# Altium PCB 新核心板PCB.PcbDoc (part 1 of 3)
Units mil, origin at the board's own origin, x right, y up, seen from the top; angles counter-clockwise.
Board outline 5840.03 x 4550.03 mil, 2 copper layers (Top Layer, Bottom Layer); 116 components, 170 nets, 698 pads, 425 vias.
Unrouted connection lines stored in the file: 1.
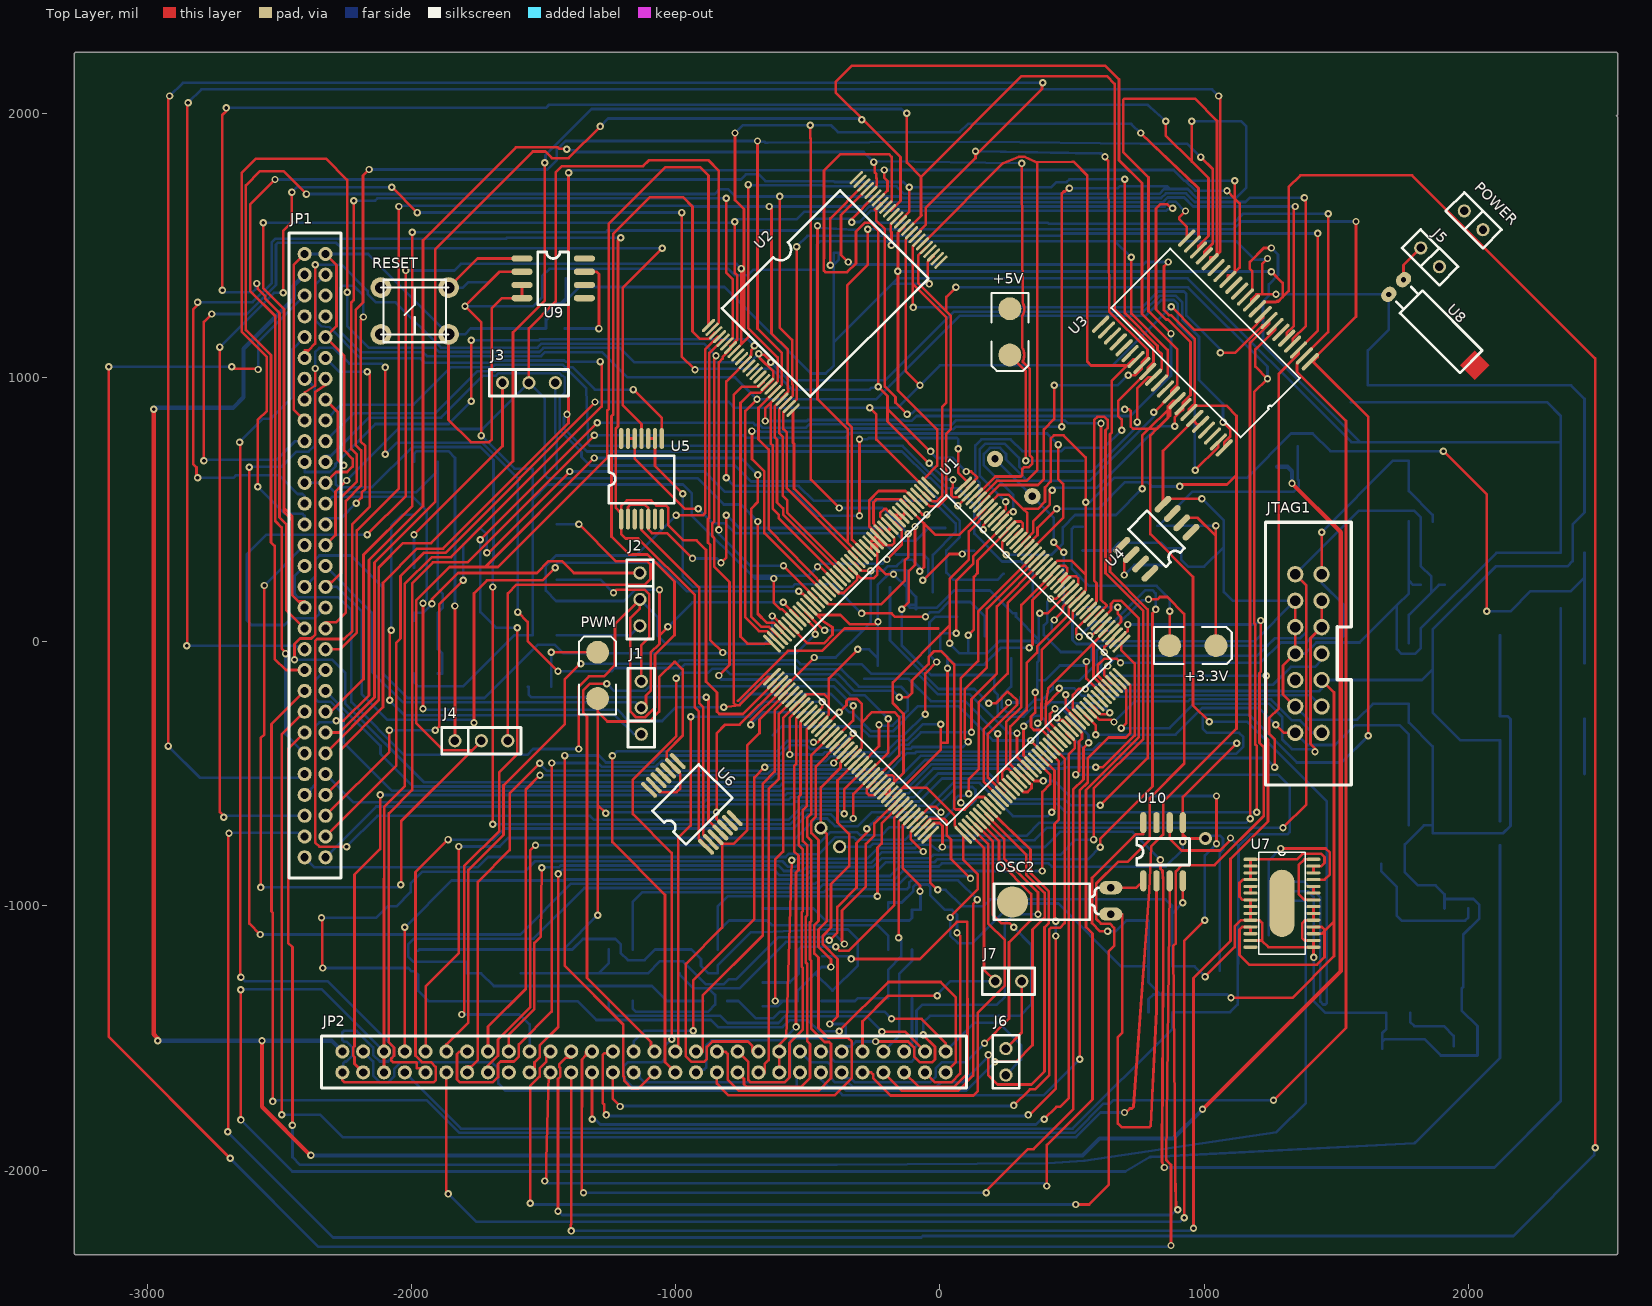
[diagram p0: Top Layer view]
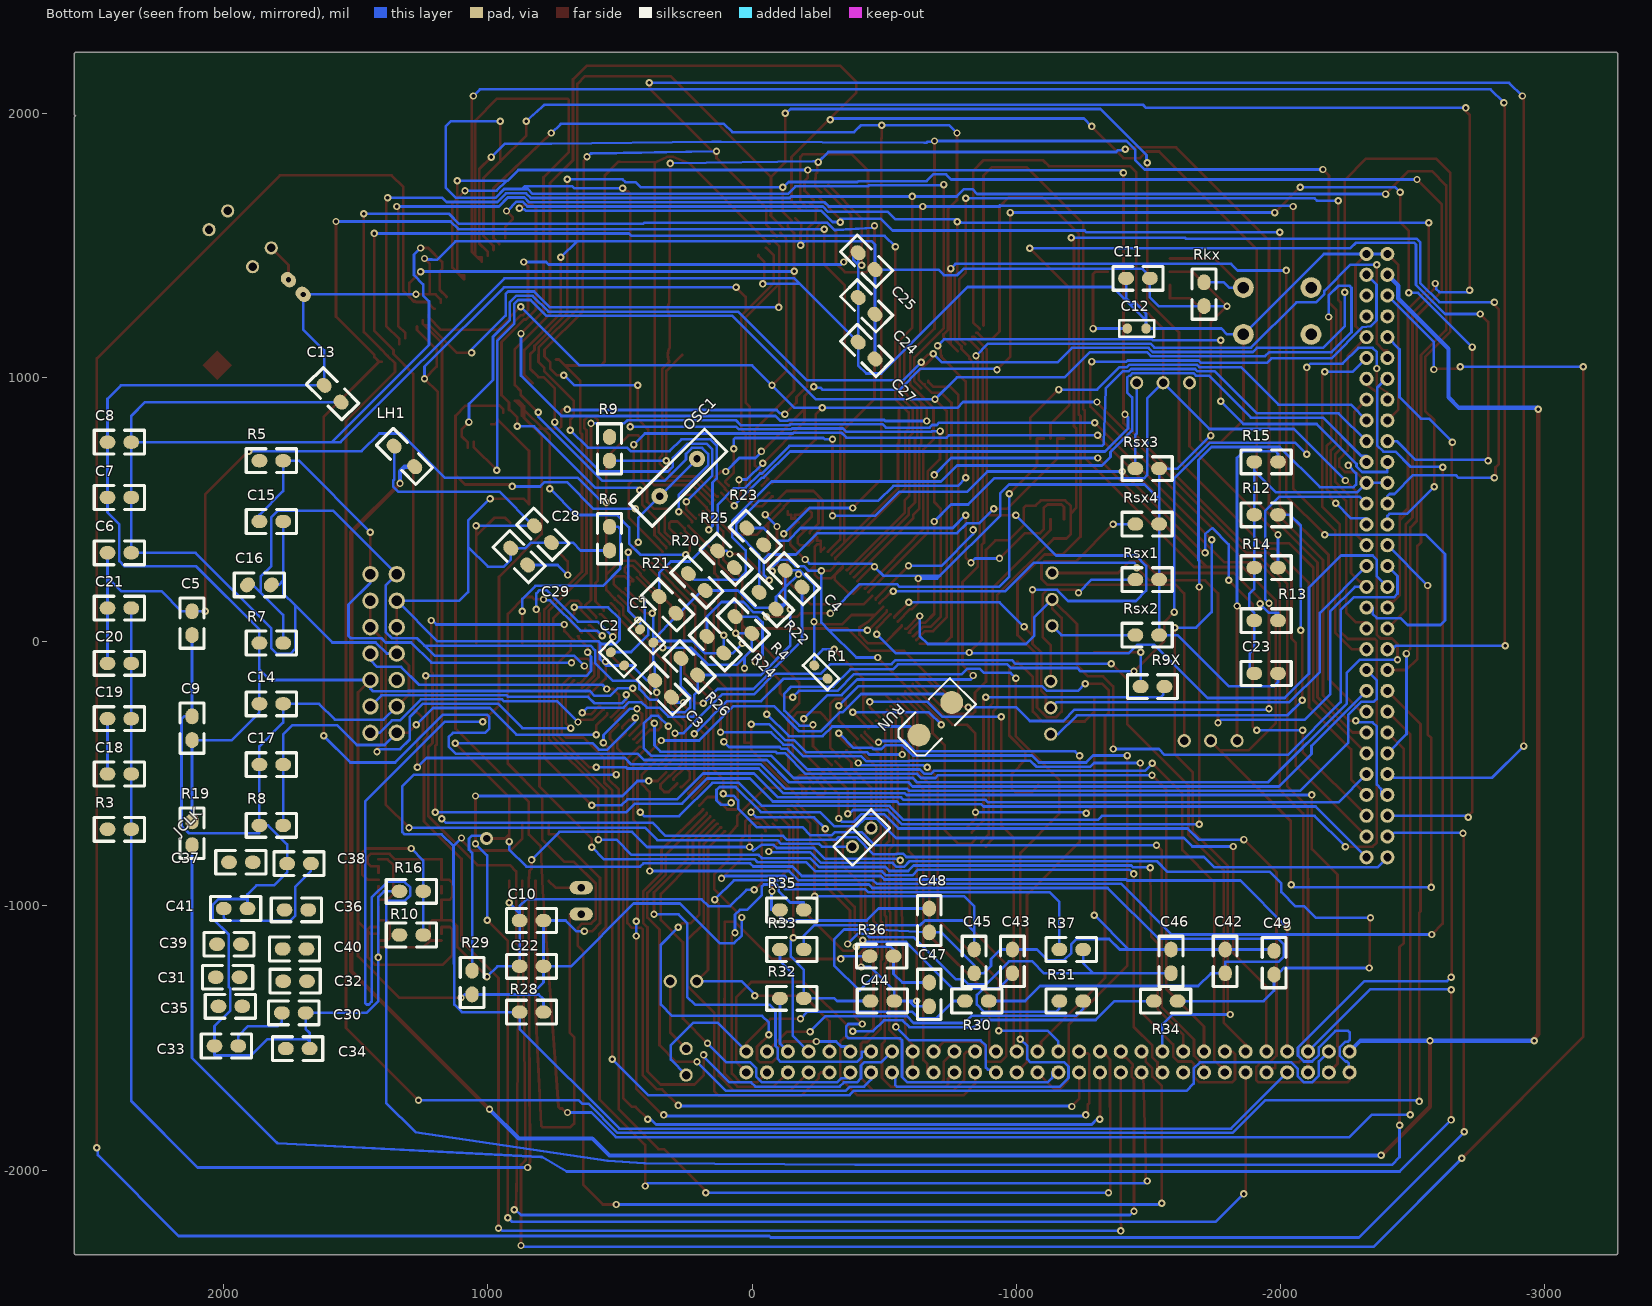
[diagram p1: Bottom Layer view, seen from below]

## Layer stack, top to bottom
Top Solder: solder mask 0.4, Solder Resist, Dk 3.5
Top Layer: signal copper 1.4
Dielectric 1: dielectric 12.6, FR-4, Dk 4.8
Bottom Layer: signal copper 1.4
Bottom Solder: solder mask 0.4, Solder Resist, Dk 3.5

## Board outline
-3270,-2320.01 cw(c-3270,-2315) -3275.01,-2315 -3275.02,2225 cw(c-3270,2225) -3270,2230.02 2560,2230.02 cw(c2560,2225) 2565.02,2225 2565.02,1995 cw(c2560,1995) 2560.39,1990 cw(c2560,1985) 2565.02,1985 2565.02,-2315 cw(c2560,-2315) 2560,-2320.01

## Design rules (kind name [scope] priority, off if disabled: settings)
Clearance [All] p1: gap=6 ignorepadtopadclearanceinfootprint=FALSE
ComponentClearance [All] p1: gap=0 collisioncheckmode=3 verticalgap=0 showdistances=FALSE
HoleToHoleClearance [All] p1: gap=6 allowstackedmicrovias=TRUE
MinimumSolderMaskSliver [All] p1: minsoldermaskwidth=0
PolygonConnect [All] p1: connectstyle=Relief reliefconductorwidth=10 reliefentries=4 polygonreliefangle="90 Angle" airgapwidth=10
RoutingVias [All] p1: holewidth=14 width=28 viastyle="Through Hole" minholewidth=28 minwidth=50 maxholewidth=28 maxwidth=50
SilkToSilkClearance [All] p1: silktosilkclearance=0
SilkToSolderMaskClearance [IsPad] p1: minsilkscreentomaskgap=0 clearancetoexposedcopper=TRUE
SolderMaskExpansion [All] p1: expansion=4 istentingtop=FALSE
Width Width_1 [InNet('+5V')] p1: maxlimit=18 minlimit=10 preferedwidth=16
Width [All] p2: maxlimit=10 minlimit=10 preferedwidth=10
25 further rules are at their usual default settings.

## Classes and differential pairs
net class GND: AGND
net class POWER: +1.8V +3.3V +5V VCC VDD

## Components (designator, comment, footprint, x,y, rotation, side; value= is the part's Value field where it differs from the comment)
+3.3V "LED" 1N60P 1045,-15 r180 top
+5V "LED" 1N60P 265,1085 r90 top
C1 "C10p-0603" C0603L 399.27,21.27 r45 bottom value=10p
C2 "C10p-0603" C0603L 510,-65 r45 bottom value=10p
C3 "2.2uF" 0805#1 305,-210 r45 bottom value=0.1uF/50V/X7R
C4 "2.2uF" 0805#1 -188.84,206.56 r45 bottom value=0.1uF/50V/X7R
C5 "0.01uF" 0805#1 2120.28,115 r270 bottom
C6 "0.1uF" 0805#1 2440,336.15 r180 bottom
C7 "0.01uF" 0805#1 2440,545.43 r180 bottom
C8 "0.1uF" 0805#1 2440,754.72 r180 bottom
C9 "0.1uF" 0805#1 2119.72,-372.5 r90 bottom
C10 "0.1uF" 0805#1 790,-1055 r0 bottom
C11 "0.1uF" 0805#1 -1505,1375.28 r0 bottom
C12 "C22n-0603" C0603L -1455,1185 r0 bottom value=22n
C13 "0.47uF" 0805#1 1620,970 r225 bottom
C14 "2.2uF" 0805#1 1865,-235.47 r180 bottom value=0.1uF/50V/X7R
C15 "0.01uF" 0805#1 1865,454.67 r180 bottom
C16 "0.01uF" 0805#2 1910,214.72 r180 bottom
C17 "0.01uF" 0805#1 1775,-464.95 r0 bottom
C18 "0.01uF" 0805#1 2440,-501 r180 bottom
C19 "0.01uF" 0805#1 2440,-291.71 r180 bottom
C20 "0.01uF" 0805#1 2440,-82.43 r180 bottom
C21 "0.1uF" 0805#1 2440,126.86 r180 bottom
C22 "0.1uF" 0805#1 790,-1228.33 r0 bottom
C23 "0.1uF" 0805#1 -1990,-120 r0 bottom
C24 "0.1uF" 0805#1 -465,1239.22 r45 bottom
C25 "0.1uF" 0805#1 -465,1408.44 r45 bottom
C27 "0.1uF" 0805#1 -465,1070 r45 bottom
C28 "2.2uF" 0805#1 823.84,438.44 r225 bottom value=0.1uF/50V/X7R
C29 "22nF" 0805#1 849.8,290.2 r45 bottom
C30 "2.2uF" 0805#1 1690,-1404.72 r0 bottom value=0.1uF/50V/X7R
C31 "2.2uF" 0805#1 1940,-1269.72 r0 bottom value=0.1uF/50V/X7R
C32 "0.1uF" 0805#1 1775,-1285.28 r180 bottom
C33 "0.1uF" 0805#1 1945,-1529.72 r0 bottom
C34 "2.2uF" 0805#1 1675,-1539.72 r0 bottom value=0.1uF/50V/X7R
C35 "2.2uF" 0805#1 2020,-1380.28 r180 bottom value=0.1uF/50V/X7R
C36 "0.1uF" 0805#1 1770,-1015.28 r180 bottom
C37 "0.1uF" 0805#1 1980,-835 r180 bottom
C38 "2.2uF" 0805#1 1760,-840.28 r180 bottom value=0.1uF/50V/X7R
C39 "2.2uF" 0805#1 1935,-1144.72 r0 bottom value=0.1uF/50V/X7R
C40 "0.1uF" 0805#1 1687,-1162.72 r0 bottom
C41 "0.1uF" 0805#1 2000,-1010.28 r180 bottom
C42 "0.1uF" 0805#1 -1790.28,-1255 r90 bottom
C43 "0.1uF" 0805#1 -985,-1255 r90 bottom
C44 "0.1uF" 0805#1 -447.5,-1360.28 r180 bottom
C45 "0.1uF" 0805#1 -839.72,-1165 r270 bottom
C46 "0.1uF" 0805#1 -1584.72,-1165 r270 bottom
C47 "0.1uF" 0805#1 -670.28,-1380 r90 bottom
C48 "0.1uF" 0805#1 -670.28,-1100 r90 bottom
C49 "0.1uF" 0805#1 -1974.72,-1170 r270 bottom
J1 "SECELCT" TTIP3 -1129.72,-350.28 r90 top
J2 "SECELCT" TTIP3 -1135.28,260.28 r270 top
J3 "SECELCT" TTIP3 -1655.28,979.72 r0 top
J4 "SECELCT" TTIP3 -1835.28,-375.28 r0 top
J5 "Header 2" TTIP2 1819.99,1489.99 r315 top
J6 "Header 2" TTIP2 250.01,-1640 r90 top
J7 "Header 2" TTIP2 210,-1285 r0 top
JCLK "Header 2" TTIP2 -450,-705 r315 bottom
JP1 "HEADER 30X2" TTIP30X2 -2325,-816.1 r90 top
JP2 "HEADER 30X2" TTIP30X2 22.4,-1551.26 r180 top
JTAG1 "HEADER 7X2" IDC14-A-JATG 1445.01,-345.13 r90 top
LH1 "INDUCTOR" 3216 1277.21,662.22 r45 bottom
OSC1 "30MHZ" XTAL1 350,550 r135 bottom
OSC2 "CR32K-DT38-12-DIP" XTAL-DIP2S3*8 647.05,-981.06 r90 top value=32.768K
POWER "Header 2" TTIP2 2055.72,1559.29 r135 top
PWM "LED" 1N60P -1295,-40 r270 top
R1 "R22K-0603" R0603L -260,-115 r45 bottom value=22K
R3 "0" 0805#1 2440,-710.28 r180 bottom
R4 "Res1" 0805#1 1.16,31.56 r45 bottom value=33
R5 "470" 0805#1 1775,685.28 r0 bottom
R6 "470" 0805#1 539.72,345 r90 bottom
R7 "470" 0805#1 1775,-4.86 r0 bottom
R8 "470" 0805#1 1775,-695 r0 bottom
R9 "1k" 0805#1 540.28,775 r270 bottom
R9X "Res1" 0805#1 -1560,-169.72 r0 bottom value=470
R10 "12k" 0805#1 1335,-1110.28 r180 bottom
R12 "Res1" 0805#1 -1900,479.86 r180 bottom value=2.2k
R13 "Res1" 0805#1 -1900,79.58 r180 bottom value=2.2k
R14 "Res1" 0805#1 -1900,279.72 r180 bottom value=2.2k
R15 "Res1" 0805#1 -1900,680 r180 bottom value=2.2k
R16 "20k" 0805#1 1335,-945 r180 bottom
R19 "Res1" 0805#1 2120.28,-680 r270 bottom value=0
R20 "Res1" 0805#1 177.62,194.02 r45 bottom value=33
R21 "Res1" 0805#1 288.34,107.74 r45 bottom value=33
R22 "Res1" 0805#1 -90.07,123.25 r45 bottom value=33
R23 "Res1" 0805#1 -43.84,366.56 r45 bottom value=33
R24 "Res1" 0805#1 107.46,-43.38 r45 bottom value=33
R25 "Res1" 0805#1 66.89,280.29 r45 bottom value=33
R26 "Res1" 0805#1 206.23,-126.69 r45 bottom value=33
R28 "10K" 0805#1 790,-1401.67 r0 bottom
R29 "10K" 0805#1 1059.72,-1335 r90 bottom
R30 "Res1" 0805#1 -895,-1359.72 r0 bottom value=100
R31 "Res1" 0805#1 -1162.5,-1360.28 r180 bottom value=100
R32 "Res1" 0805#1 -195,-1349.72 r0 bottom value=100
R33 "Res1" 0805#1 -195,-1164.72 r0 bottom value=100
R34 "Res1" 0805#1 -1610,-1360 r0 bottom value=100
R35 "Res1" 0805#1 -105,-1015.28 r180 bottom value=100
R36 "Res1" 0805#1 -535,-1190 r0 bottom value=100
R37 "Res1" 0805#1 -1252.5,-1164.72 r0 bottom value=100
RESET "SW-PB" KEY2 -1859.09,1162.83 r180 top
Rkx "10K" 0805#1 -1710.28,1270 r90 bottom
Rsx1 "Res1" 0805#1 -1450,234.58 r180 bottom value=20k
Rsx2 "Res1" 0805#1 -1450,24.5 r180 bottom value=20k
Rsx3 "Res1" 0805#1 -1450,654.72 r180 bottom value=20k
Rsx4 "Res1" 0805#1 -1450,444.65 r180 bottom value=20k
RUN "LED" 1N60P -631.26,-353.74 r135 bottom
U1 "TMS320F28335" LQFP-176 -635.03,-132.59 r45 top
U2 "SST39VF800A" TSOP48 -875.51,1196.39 r45 top
U3 "IS61LV25616-10/12/15TI" "TSOP II Z44" 1402.06,1059.38 r135 top
U4 "MAX6193" SO-8 950.71,414.29 r225 top
U5 "74HC32DB" SSOP14 -1205.72,463.79 r90 top
U6 "74HC04DB" SSOP14 -884.73,-776.23 r135 top
U7 "TPS767D301" TSOP-28 1295,-990 r0 top
U8 "REF3020" X3-1 1699.11,1314.51 r225 top
U9 "SP708/R/S/T" SOIC-8 -1581.22,1449.72 r0 top
U10 "DS1338-33+" SO-08 770.28,-904.72 r90 top

## Footprints (in the part's own frame and the unit in brackets; to place one, negate y for a bottom-side part, rotate by r counter-clockwise, add the part's x,y. Pads: shape width x height; smd on the part's side, far side on the other; paste and mask are expansions set on the pad)
1N60P [mm]
  round 2.2 smd mask+0: A(0,0) K(4.445,0)
  silkscreen extent -1.52,-1.78 5.97,1.78
0805#1 [mil]
  oval 60x50 smd mask+0: 1(0,0.28) 2(90,0.28)
  silkscreen extent -50,-45 140,45
0805#2 [mil]
  oval 60x50 smd rot 45 mask+0: 1(0,0.28) 2(90,0.28)
  silkscreen extent -50,-45 140,45
3216 [mil]
  oval 60x50 smd mask+0: 1(110,0.01) 2(0,0.01)
  silkscreen extent -50,-45 160,45
C0603L [mm] "Chip Inductor; Body 1.6x0.8mm (LxW typ)"
  oval 0.9x1 smd mask+0: 1(-0.9,0) 2(0.9,0)
  silkscreen extent -1.68,-0.79 1.68,0.79, body extent -0.8,-0.4 0.8,0.4, height 0.7
IDC14-A-JATG [mil]
  round 62 hole 40 mask+0: 1(0.13,0.01) 2(0.13,100.01) 3(100.13,0.01) 4(100.13,100.01) 5(200.13,0.01) 6(200.13,100.01) 7(300.13,0.01) 8(300.13,100.01) 9(400.13,0.01) 10(400.13,100.01) 11(500.13,0.01) 12(500.13,100.01) 13(600.13,0.01) 14(600.13,100.01)
  silkscreen extent -197,-112 797,212
KEY2 [mm]
  round 2 hole 1.1 mask+0: 1(0,0) 2(0,-4.5) 3(6.5,-4.5) 4(6.5,0)
  silkscreen extent 0,-5.25 6.5,0.75
LQFP-176 [mm]
  oval 2.3x0.3 smd mask+0: 1(0,0) 2(0,-0.5) 3(0,-1) 4(0,-1.5) 5(0,-2) 6(0,-2.5) 7(0,-3) 8(0,-3.5) 9(0,-4) 10(0,-4.5) 11(0,-5) 12(0,-5.5) 13(0,-6) 14(0,-6.5) 15(0,-7) 16(0,-7.5) 17(0,-8) 18(0,-8.5) 19(0,-9) 20(0,-9.5) 21(0,-10) 22(0,-10.5) 23(0,-11) 24(0,-11.5) 25(0,-12) 26(0,-12.5) 27(0,-13) 28(0,-13.5) 29(0,-14) 30(0,-14.5) 31(0,-15) 32(0,-15.5) 33(0,-16) 34(0,-16.5) 35(0,-17) 36(0,-17.5) 37(0,-18) 38(0,-18.5) 39(0,-19) 40(0,-19.5) 41(0,-20) 42(0,-20.5) 43(0,-21) 44(0,-21.5) 89(26,-21.5) 90(26,-21) 91(26,-20.5) 92(26,-20) 93(26,-19.5) 94(26,-19) 95(26,-18.5) 96(26,-18) 97(26,-17.5) 98(26,-17) 99(26,-16.5) 100(26,-16) 101(26,-15.5) 102(26,-15) 103(26,-14.5) 104(26,-14) 105(26,-13.5) 106(26,-13) 107(26,-12.5) 108(26,-12) 109(26,-11.5) 110(26,-11) 111(26,-10.5) 112(26,-10) 113(26,-9.5) 114(26,-9) 115(26,-8.5) 116(26,-8) 117(26,-7.5) 118(26,-7) 119(26,-6.5) 120(26,-6) 121(26,-5.5) 122(26,-5) 123(26,-4.5) 124(26,-4) 125(26,-3.5) 126(26,-3) 127(26,-2.5) 128(26,-2) 129(26,-1.5) 130(26,-1) 131(26,-0.5) 132(26,0)
  oval 0.3x2.3 smd mask+0: 45(2.25,-23.75) 46(2.75,-23.75) 47(3.25,-23.75) 48(3.75,-23.75) 49(4.25,-23.75) 50(4.75,-23.75) 51(5.25,-23.75) 52(5.75,-23.75) 53(6.25,-23.75) 54(6.75,-23.75) 55(7.25,-23.75) 56(7.75,-23.75) 57(8.25,-23.75) 58(8.75,-23.75) 59(9.25,-23.75) 60(9.75,-23.75) 61(10.25,-23.75) 62(10.75,-23.75) 63(11.25,-23.75) 64(11.75,-23.75) 65(12.25,-23.75) 66(12.75,-23.75) 67(13.25,-23.75) 68(13.75,-23.75) 69(14.25,-23.75) 70(14.75,-23.75) 71(15.25,-23.75) 72(15.75,-23.75) 73(16.25,-23.75) 74(16.75,-23.75) 75(17.25,-23.75) 76(17.75,-23.75) 77(18.25,-23.75) 78(18.75,-23.75) 79(19.25,-23.75) 80(19.75,-23.75) 81(20.25,-23.75) 82(20.75,-23.75) 83(21.25,-23.75) 84(21.75,-23.75) 85(22.25,-23.75) 86(22.75,-23.75) 87(23.25,-23.75) 88(23.75,-23.75) 133(23.75,2.25) 134(23.25,2.25) 135(22.75,2.25) 136(22.25,2.25) 137(21.75,2.25) 138(21.25,2.25) 139(20.75,2.25) 140(20.25,2.25) 141(19.75,2.25) 142(19.25,2.25) 143(18.75,2.25) 144(18.25,2.25) 145(17.75,2.25) 146(17.25,2.25) 147(16.75,2.25) 148(16.25,2.25) 149(15.75,2.25) 150(15.25,2.25) 151(14.75,2.25) 152(14.25,2.25) 153(13.75,2.25) 154(13.25,2.25) 155(12.75,2.25) 156(12.25,2.25) 157(11.75,2.25) 158(11.25,2.25) 159(10.75,2.25) 160(10.25,2.25) 161(9.75,2.25) 162(9.25,2.25) 163(8.75,2.25) 164(8.25,2.25) 165(7.75,2.25) 166(7.25,2.25) 167(6.75,2.25) 168(6.25,2.25) 169(5.75,2.25) 170(5.25,2.25) 171(4.75,2.25) 172(4.25,2.25) 173(3.75,2.25) 174(3.25,2.25) 175(2.75,2.25) 176(2.25,2.25)
  silkscreen extent 1.79,-21.96 24.21,0.47
R0603L [mm] "Chip Inductor; Body 1.6x0.8mm (LxW typ)"
  oval 1x0.9 smd mask+0: 1(-0.9,0) 2(0.9,0)
  silkscreen extent -1.68,-0.79 1.68,0.79, body extent -0.78,-0.43 0.77,0.42, height 0.45
SO-8 [mil]
  oval 80x24 smd mask+0: 1(0,0) 2(0,-50) 3(0,-100) 4(0,-150) 5(220,-150) 6(220,-100) 7(220,-50) 8(220,0)
  silkscreen extent 60,-175 160,25
SO-08 [mil]
  oval 80x24 smd mask+0: 1(-0.28,0.28) 2(-0.28,-49.72) 3(-0.28,-99.72) 4(-0.28,-149.72) 5(219.72,-149.72) 6(219.72,-99.72) 7(219.72,-49.72) 8(219.72,0.28)
  silkscreen extent 60,-175 160,25
SOIC-8 [mil]
  oval 80x24 smd mask+0: 1(0,0.28) 2(0,-49.72) 3(0,-99.72) 4(0,-149.72) 5(236.22,-149.72) 6(236.22,-99.72) 7(236.22,-49.72) 8(236.22,0.28)
  silkscreen extent 60,-175 176,25
SSOP14 [mm]
  oval 2x0.406 smd mask+0: 1(0,0) 2(0,-0.65) 3(0,-1.3) 4(0,-1.95) 5(0,-2.6) 6(0,-3.25) 7(0,-3.9) 8(7.75,-3.9) 9(7.75,-3.25) 10(7.75,-2.6) 11(7.75,-1.95) 12(7.75,-1.3) 13(7.75,-0.65) 14(7.75,0)
  silkscreen extent 1.52,-5.1 6.1,1.2
TSOP48 [mm]
  oval 1.7x0.269 smd mask+0: 1(0,0) 2(0,-0.5) 3(0,-1) 4(0,-1.5) 5(0,-2) 6(0,-2.5) 7(0,-3) 8(0,-3.5) 9(0,-4) 10(0,-4.5) 11(0,-5) 12(0,-5.5) 13(0,-6) 14(0,-6.5) 15(0,-7) 16(0,-7.5) 17(0,-8) 18(0,-8.5) 19(0,-9) 20(0,-9.5) 21(0,-10) 22(0,-10.5) 23(0,-11) 24(0,-11.5) 25(20.1,-11.5) 26(20.1,-11) 27(20.1,-10.5) 28(20.1,-10) 29(20.1,-9.5) 30(20.1,-9) 31(20.1,-8.5) 32(20.1,-8) 33(20.1,-7.5) 34(20.1,-7) 35(20.1,-6.5) 36(20.1,-6) 37(20.1,-5.5) 38(20.1,-5) 39(20.1,-4.5) 40(20.1,-4) 41(20.1,-3.5) 42(20.1,-3) 43(20.1,-2.5) 44(20.1,-2) 45(20.1,-1.5) 46(20.1,-1) 47(20.1,-0.5) 48(20.1,0)
  silkscreen extent 2.08,-11.75 18.14,0.25
"TSOP II Z44" [mm]
  oval 0.35x2.2 smd mask+0: 1(0,0) 2(0.8,0) 3(1.6,0) 4(2.4,0) 5(3.2,0) 6(4,0) 7(4.8,0) 8(5.6,0) 9(6.4,0) 10(7.2,0) 11(8,0) 12(8.8,0) 13(9.6,0) 14(10.4,0) 15(11.2,0) 16(12,0) 17(12.8,0) 18(13.6,0) 19(14.4,0) 20(15.2,0) 21(16,0) 22(16.8,0) 23(16.8,11.7) 24(16,11.7) 25(15.2,11.7) 26(14.4,11.7) 27(13.6,11.7) 28(12.8,11.7) 29(12,11.7) 30(11.2,11.7) 31(10.4,11.7) 32(9.6,11.7) 33(8.8,11.7) 34(8,11.7) 35(7.2,11.7) 36(6.4,11.7) 37(5.6,11.7) 38(4.8,11.7) 39(4,11.7) 40(3.2,11.7) 41(2.4,11.7) 42(1.6,11.7) 43(0.8,11.7) 44(0,11.7)
  silkscreen extent -0.4,1.84 17.2,9.87
TSOP-28 [mil]
  oval 54x12 smd mask+0: 1(-119,166.34) 2(-119,140.75) 3(-119,115.16) 4(-119,89.57) 5(-119,63.98) 6(-119,38.39) 7(-119,12.8) 8(-119,-12.8) 9(-119,-38.39) 10(-119,-63.98) 11(-119,-89.57) 12(-119,-115.16) 13(-119,-140.75) 14(-119,-166.34) 15(119,-166.34) 16(119,-140.75) 17(119,-115.16) 18(119,-89.57) 19(119,-63.98) 20(119,-38.39) 21(119,-12.8) 22(119,12.8) 23(119,38.39) 24(119,63.98) 25(119,89.57) 26(119,115.16) 27(119,140.75) 28(119,166.34)
  oval 94.49x254.33 smd mask+0: 29(0,0)
  silkscreen extent -88,-193 88,193
TTIP2 [mil]
  round 50 hole 32 mask+0: 1(0,0.01) 2(100,0.01)
  silkscreen extent -50,-50 150,50
TTIP3 [mil]
  round 50 hole 32 mask+0: 1(0.28,0.28) 2(100.28,0.28) 3(200.28,0.28)
  silkscreen extent -50,-50 250,50
TTIP30X2 [mm]
  round 1.36 hole 0.787 mask+0: 1(0,0) 2(0,2) 3(2,0) 4(2,2) 5(4,0) 6(4,2) 7(6,0) 8(6,2) 9(8,0) 10(8,2) 11(10,0) 12(10,2) 13(12,0) 14(12,2) 15(14,0) 16(14,2) 17(16,0) 18(16,2) 19(18,0) 20(18,2) 21(20,0) 22(20,2) 23(22,0) 24(22,2) 25(24,0) 26(24,2) 27(26,0) 28(26,2) 29(28,0) 30(28,2) 31(30,0) 32(30,2) 33(32,0) 34(32,2) 35(34,0) 36(34,2) 37(36,0) 38(36,2) 39(38,0) 40(38,2) 41(40,0) 42(40,2) 43(42,0) 44(42,2) 45(44,0) 46(44,2) 47(46,0) 48(46,2) 49(48,0) 50(48,2) 51(50,0) 52(50,2) 53(52,0) 54(52,2) 55(54,0) 56(54,2) 57(56,0) 58(56,2) 59(58,0) 60(58,2)
  silkscreen extent -2,-1.5 60,3.5
X3-1 [mm]
  oval 1.57x1.27 hole 0.5 mask+0: 1(0,0.007) 2(-2,0.007)
  Top Layer region: 0,11.691 -2.032,11.691 -2.032,9.659 0,9.659
  silkscreen extent -2.54,1.02 0.51,10.17
XTAL1 [mil]
  round 62 hole 28 mask+0: 1(0,0.28) 2(200,0.28)
  silkscreen extent -100,-60 300,60
XTAL-DIP2S3*8 [mil]
  round 118.11 smd mask+0: 0(-3.94,372.05)
  oval 50x88 hole 28 mask+0: 1(-50,0) 2(50,0)
  silkscreen extent -72,45 65,442, body extent -73,-23 63,401, height 126

## Part data
C1 C2: "Pb-free,0603,10pF,NPO,±5%,50V,-55℃～125℃,N（三层电镀端头）,带装", Part Number=3DZ0040010, specification=Pb-free,0603,10pF,NPO,±5%,50V,-55℃～125℃,N（三层电镀端头）,带装
C3 C4 C14 C28 C30 C31 C34 C35 C38 C39: library part "Cap Pol3", "Polarized Capacitor (Surface Mount)", LatestRevisionDate=29-May-2009, LatestRevisionNote="IPC-7351 Footprint Added.", PackageDescription="Chip Capacitor", PackageReference=C0805, Published=8-Jun-2000, Publisher="Altium Limited"
C5 C6 C7 C8 C9 C10 C11 C13 C18 C19 C20 C21 C22 C23 C24 C25 C27 C29 C32 C33 C36 C37 C40 C41 C42 C43 C44 C45 C46 C47 C48 C49: library part CAP, "Capacitor"
C12: "Pb-free,0603,22nF,X7R,±10%,50V,-55℃～125℃,N（三层电镀端头）,带装", Part Number=3DZ0040018, specification=Pb-free,0603,22nF,X7R,±10%,50V,-55℃～125℃,N（三层电镀端头）,带装
C15 C16 C17: library part C
J5 J6 J7 JCLK POWER: "Header, 2-Pin", LatestRevisionDate=17-Jul-2002, LatestRevisionNote="Re-released for DXP Platform.", Publisher="Altium Limited"
JP1 JP2: library part "Header 30X2", "Header, 30-Pin, Dual row", LatestRevisionDate=17-Jul-2002, LatestRevisionNote="Re-released for DXP Platform.", Publisher="Altium Limited"
JTAG1: library part JTAG-1
OSC1: "Crystal Oscillator"
OSC2: "Pb-free,直插晶体谐振器,DT38G-C12Q-32.768KHz,32.768KHz,12.5pF,±20ppm,DT38（3*8mm）,-40°C~+85°C", Part Number=3DZ0070001, specification=Pb-free,直插晶体谐振器,DT38G-C12Q-32.768KHz,32.768KHz,12.5pF,±20ppm,DT38（3*8mm）,-40°C~+85°C
R1: "Pb-free,0603,22kΩ,1%,1/16w,±200PPM,50V,-55℃～155℃", Part Number=3DZ0030038, specification=Pb-free,0603,22kΩ,1%,1/16w,±200PPM,50V,-55℃～155℃
R3 R5 R6 R7 R8 R9 R10 R16 R28 R29 Rkx: library part R
R4 R9X R12 R13 R14 R15 R19 R20 R21 R22 R23 R24 R25 R26 R30 R31 R32 R33 R34 R35 R36 R37 Rsx1 Rsx2 Rsx3 Rsx4: "Resistor", LatestRevisionDate=17-Jul-2002, LatestRevisionNote="Re-released for DXP Platform.", PackageReference=AXIAL-0.3, Published=8-Jun-2000, Publisher="Altium Limited"
RESET: "Switch", LatestRevisionDate=17-Jul-2002, LatestRevisionNote="Re-released for DXP Platform.", PackageReference=SPST-2, Published=24-Mar-1999, Publisher="Altium Limited"
U2: library part SST39VF800
U3: library part CY7C1041
U5: library part HD74HC32FP, "Quad 2-Input OR Gates", Code_JEITA=P-SOP14-5.5x10.06-1.27, ComponentLink1Description="Manufacturer Link", ComponentLink1URL=http://sg.renesas.com/fmwk.jsp?cnt=hd74hc_root.jsp&fp=/products/standard_ic/general_purpose_logic/5v_standard_logic/hd74hc/, ComponentLink2Description=Datasheet, ComponentLink2URL=http://documentation.renesas.com/eng/products/logic/rej03d0545_hd74hc32ds.pdf, ComponentLink3Description="Packaging Specification", ComponentLink3URL=http://sg.renesas.com/media/products/common_info/package/pdf/ic/code/prsp0014df_b.pdf, DatasheetVersion="Rev.2.00, Oct-2005", PackageDescription="14-Pin Plastic Small Outline Package, 10.06 x 5.5 mm Body, 1.27 mm Pitch", PackageReference=PRSP0014DF-B, PackageVersion=Sep-2005, Published=10-Feb-2010, Publisher="Altium Limited"
U6: library part HD74HC04FP, "Hex Inverters", Code_JEITA=P-SOP14-5.5x10.06-1.27, ComponentLink1Description="Manufacturer Link", ComponentLink1URL=http://sg.renesas.com/fmwk.jsp?cnt=hd74hc_root.jsp&fp=/products/standard_ic/general_purpose_logic/5v_standard_logic/hd74hc/, ComponentLink2Description=Datasheet, ComponentLink2URL=http://documentation.renesas.com/eng/products/logic/rej03d0534_hd74hc04ds.pdf, ComponentLink3Description="Packaging Specification", ComponentLink3URL=http://sg.renesas.com/media/products/common_info/package/pdf/ic/code/prsp0014df_b.pdf, DatasheetVersion="Rev.2.00, Oct-2005", PackageDescription="14-Pin Plastic Small Outline Package, 10.06 x 5.5 mm Body, 1.27 mm Pitch", PackageReference=PRSP0014DF-B, PackageVersion=Sep-2005, Published=10-Feb-2010, Publisher="Altium Limited"
U7: library part TPS767D301_1
U9: library part MAX708TCSA, "+3V Voltage Monitoring, Low-Cost, 礟 Supervisory Circuit", Code_IPC=SOIC127P600-8, Code_JEDEC=MS-012-AA, ComponentLink1Description="Manufacturer Link", ComponentLink1URL=http://www.maxim-ic.com/, ComponentLink2Description=Datasheet, ComponentLink2URL=http://pdfserv.maxim-ic.com/en/ds/MAX706P-MAX708T.pdf, DatasheetVersion=Sep-1995, LatestRevisionDate=13-Apr-2006, LatestRevisionNote="IPC-7351 Footprint Added.", PackageDescription="8-Pin Small Outline Integrated Circuit 1.27 mm Pitch", PackageReference=NSO8, Published=16-Jan-2001, Publisher="Altium Limited"
U10: library part X1205

## Via types
v1: diameter 28, hole 14, Top Layer to Bottom Layer, 424 vias
v2: diameter 50, hole 28, Top Layer to Bottom Layer, 1 vias

## Nets (pads, with @x,y where several pads share a name; then routed paths per layer and width w, separated by ;. In a path a pad name is that pad's centre, name@x,y a point inside that pad or via, vN(x,y) a via of type N, cw(c..) or ccw(c..) an arc to the next point about the centre after c; other vN are vias at no path point)
+1.8V: C5.1 C6.1 C20.1 C21.1 U1.4 U1.15 U1.23 U1.29 U1.31 U1.59 U1.61 U1.101 U1.109 U1.117 U1.126 U1.139 U1.146 U1.154 U1.167 | length 9110.4
  Top Layer w10: v1(-715.56,-314.31) -715.56,-300.55 U1.4@-593.28,-178.27 ; U1.4@-593.28,-174.34 U1.4@-593.28,-178.27 ; U1.167@-509.76,117.97 -509.76,114.04 -438.72,43 v1(-436,43) ; v1(-475.01,-60) U1.4@-593.28,-178.27 ; U1.15@-440.16,-327.45 v1@-381,-268.29 ; v1(-381,-267.44) v1@-381,-268.29 ; U1.23@-328.81,-438.81 -328.81,-434.88 -295,-401.07 -295,-305.57 ; U1.154@-328.81,298.92 -324.88,298.92 -293.96,268 v1(-262,268) ; U1.31@-217.45,-550.16 -248.28,-580.99 -268,-580.99 -276.12,-572.87 -276.12,-557.08 -248.33,-529.29 -248.33,-522.33 U1.29@-245.29,-522.33 -153.62,-430.65 -153.62,-285.13 -172,-266.75 -256.18,-266.75 -295,-305.57 ; U1.146@-217.45,410.28 -217.45,414.2 -251,447.75 -251,527 -239,539 -147.38,539 -120.02,511.64 U1.139@-120.02,507.71 -60,447.69 ; v1(-76,266) -60,282 -60,447.69 ; U1.59@283.65,-536.24 316.4,-569 332.4,-569 347.01,-554.4 347.01,-540 315.41,-508.41 U1.61@311.48,-508.41 267,-463.92 267,-321 329,-259 329,-80.72 368.72,-41 368.72,-18.28 487.37,100.37 487.37,130.74 U1.101@520.27,163.65 ; U1.117@297.56,382.44 331,415.87 331,486.36 314.36,503 ; U1.109@408.92,271.08 443.87,306.03 500,306.03 552,254.03 ; U1.101@520.27,159.73 U1.101@520.27,163.65 ; v1(1906,721) 2070,557 v1(2070,115) ; v1@-381,-268.29 -353,-240.29 -353,-225 -345,-217 -314.06,-217 -295,-236.06 -295,-305.57 ; -60,447.69 -16.31,404 72.51,404 172.29,503.78 U1.126@172.29,507.71 220.47,555.89 261.47,555.89 314.36,503 ; 314.36,503 371,503 397.97,529.97 397.97,583.97 419.7,605.7 419.7,768.7 432,781 468.23,781 552,697.23 v1(552,528) 552,254.03 ; U1.101@520.27,163.65 552,195.38 552,254.03
  Bottom Layer w10: v1(-715.56,-314.31) -668.69,-267.44 v1(-381,-267.44) ; v1(-475.01,-60) -394,-60 -291,43 ; v1(-436,43) -291,43 ; v1(-76,266) -76,282 -104,310 -140,310 -164,286 -196,286 -214,268 v1(-262,268) -262,72 -291,43 ; v1(552,528) 568,528 660,620 1162,620 1330,788 1411,788 1478,721 v1(1906,721) ; v1(2070,115) C5.1@2120,115 2159,115 2235,191 2388,191 2440,243 ; C20.1@2440,-82.14 C21.1@2440,127.14 2440,243 ; C6.1@2440,336.43 2440,243
+3.3V: JP1.57 JP2.55 JP2.56 R19.2 | length 11348.6
  Top Layer w10: v1(-2646.1,-1317.2) -2645.55,-1317.75 -2645.55,-1809.5 v1@-2643,-1812.05 ; JP2.56@-2103.58,-1630 JP2.55@-2103.58,-1551.26 -2103.58,-897.58 -2101.88,-895.88 -2101.88,-624.27 -2025,-547.4 -2025,217.51 -1922.51,320 -1849.3,320 -1280,889.3 -1280,1055 v1(-1285,1060)
  Bottom Layer w10: v1(-2646.1,-1317.2) -2643.9,-1315 -2339.84,-1315 JP2.55@-2103.58,-1551.26 ; v1@-2643,-1812.05 -2452.98,-2002.07 -2450.05,-2005 701.4,-2005 795.34,-1950.23 797.76,-1950.1 1797.22,-1897.78 1799.97,-1895.03 2120,-1575 R19.2@2120,-770 ; JP1.57@-2325,1388.62 -2362.77,1350.85 -2362.77,1215.5 -2340.65,1193.37 -2309.35,1190.17 -2191.69,1072.51 -1965.51,1072.51 -1948,1055 -1698.79,1055 -1689.79,1064 -1420.21,1064 -1416.21,1060 v1(-1285,1060)
  other v1: -2645,-1810
+5V: JP1.58 JP2.59 LH1.2 | length 10759.5
  Top Layer w16: v1(-2975,880) -2975,-1485.8 -2960,-1500.8 v1(-2960,-1510) ; v1(-2565,-1510) -2565,-1760 -2381,-1944 v1(-2380,-1944) ; v1(994,-1770) 1517.71,-1246.29 1517.71,414.29 v1(1333,599)
  Bottom Layer w16: v1(-2975,880) -2970,885 -2675,885 -2635,925 -2635,1108.4 -2445,1298.4 -2445,1347.36 JP1.58@-2403.74,1388.62 ; v1(-2960,-1510) v1(-2565,-1510) -2302.32,-1510 JP2.59@-2261.06,-1551.26 ; v1(-2380,-1944) 533.34,-1945.03 539.97,-1945.03 605,-1880 883.63,-1880 993.63,-1770 v1(994,-1770) ; LH1.2@1277.22,662.22 1316,662.22 1333,645.22 v1(1333,599)
ADCREFM: C3.1 U1.55 | length 491.5
  Top Layer w10: U1.55@227.97,-591.92 166,-529.95 166,-332.79 260,-238.79 v1(260,-230)
  Bottom Layer w10: v1(260,-230) 305.2,-230 C3.1@305.2,-210.2
ADCRESEXT: R1.1 U1.57 | length 821.7
  Top Layer w10: v1(219,-349) 219,-528.56 254.52,-564.08 U1.57@255.81,-564.08
  Bottom Layer w10: R1.1@-285.05,-140.05 -119.41,-140.05 -34.14,-225.32 95.32,-225.32 v1(219,-349)
ADCTEST: J6.2 J7.2 | length 279.9
  Top Layer w10: J6.2@250,-1540 310,-1480 J7.2@310,-1284.99
ADREFIN: U1.54
AGND: C18.2 C19.2 C20.2 C21.2 JP2.17 JP2.18 R3.2 U1.43 | length 7112.9
  Top Layer w10: JP2.18@-607.52,-1630 JP2.17@-607.52,-1551.26 -607.52,-1524.97 -583.87,-1501.32 -581,-1498.45 v1(-560,-827) ; U1.43@-50.42,-717.2 -50.42,-713.27 -23.15,-686 -1,-686 10,-697 v1(10,-777) ; v1(835,-826) 835,-859.47 840.07,-864.54 843,-867.47 846,-908.37 846,-1198.15 841,-1946.73 841,-1968.27 841.76,-1970.14 v1(850,-1990)
  Bottom Layer w10: v1(-560,-827) -554,-821 -274.06,-821 -234.06,-781 -93,-781 -80.92,-768.92 -36.5,-768.92 -4,-791 v1(10,-777) 398,-777 455,-720 729,-720 v1(835,-826) ; v1(850,-1990) 2098.82,-1990 2350,-1738.82 R3.2@2350,-710 C18.2@2350,-500.71 C19.2@2350,-291.43 C20.2@2350,-82.14 C21.2@2350,127.14
AINA1: C42.1 R30.1 U1.42 | length 3860.2
  Top Layer w10: U1.42@-64.34,-703.28 -64.34,-699.35 -34.99,-670 15.64,-670 26.64,-681 26.64,-733.54 42.34,-749.25 42.34,-822.34 v1(116,-896)
  Bottom Layer w10: R30.1@-895,-1360 -1033,-1360 -1090,-1303 -1688,-1303 -1736,-1255 C42.1@-1790,-1255 -1790,-1211 -1993,-1211 -2011,-1193 -2011,-1145 -1990,-1124 -1537,-1124 -1345,-932 -455,-932 -442,-919 -156,-919 -124,-887 102,-887 111,-896 v1(116,-896)
AINA2: C49.2 R34.1 U1.41 | length 3559.7
  Top Layer w10: v1(-2340,-1045) -2337.5,-1047.5 -2337.5,-1232.5 v1(-2335,-1235) ; U1.41@-78.26,-689.36 -110,-721.1 -110,-747 v1(-63,-794)
  Bottom Layer w10: v1(-2340,-1045) -2133,-1045 -2089.5,-1001.5 -2056.5,-1001.5 -2002.5,-947.5 -2002.5,-914.5 -1959,-871 -1572,-871 -1532,-831 -595,-831 -574,-852 -546,-852 -531,-837 -260,-837 -220,-797 -66,-797 v1(-63,-794) ; v1(-2335,-1235) -2010.86,-1235 -1998.51,-1247.35 -1987.65,-1247.35 C49.2@-1975,-1260 -1975,-1321 -1935.72,-1360.28 R34.1@-1610,-1360.28
AINA3: C43.1 R31.1 U1.40 | length 2030.8
  Top Layer w10: v1(-418,-1130) -387.78,-1099.78 -387.78,-1003.78 -315,-931 -315,-762 -264.5,-711.5 -268,-708 v1(-277,-708) ; U1.40@-92.18,-675.44 -88.25,-675.44 -37.3,-624.49 -16.1,-624.49 v1(4.41,-645)
  Bottom Layer w10: R31.1@-1162.5,-1360 -1162.5,-1388.5 -1151,-1400 -876,-1400 -850,-1374 -850,-1337 -875,-1312 ; C43.1@-984.72,-1255 -984.72,-1260 -932.72,-1312 -875,-1312 ; v1(-418,-1130) -419,-1130 -419,-1136 -582,-1136 -758,-1312 -875,-1312 ; v1(-277,-708) -234,-665 -15.59,-665 v1(4.41,-645)
AINA4: C48.2 R35.1 U1.39 | length 1045.1
  Top Layer w10: U1.39@-106.1,-661.52 -140,-695.42 -140,-857.59 -75,-922.59 v1(-75,-944)
  Bottom Layer w10: C48.2@-670,-1010 -478,-1010 -433,-1055 -115,-1055 -105,-1045 R35.1@-105,-1015 -73,-1015 -73,-946 v1(-75,-944)
AINA5: C44.1 R32.1 U1.38 | length 1000.2
  Top Layer w10: v1(-156,-1121) -156,-680.44 -123.16,-647.6 U1.38@-120.02,-647.6
  Bottom Layer w10: C44.1@-447.5,-1360 -321,-1360 -311,-1350 R32.1@-195,-1350 -195,-1241 -146,-1192 -146,-1131 v1(-156,-1121)
AINA6: C47.2 R36.1 U1.37 | length 1067.6
  Top Layer w10: v1(-394,-1155) -379.53,-1169.47 -344.3,-1169.47 -172,-997.17 -172,-667.82 -137.86,-633.68 U1.37@-133.94,-633.68
  Bottom Layer w10: C47.2@-670,-1290 -568,-1290 -535,-1257 R36.1@-535,-1190.28 -535,-1165 -524,-1154 -427,-1154 -426,-1155 v1(-394,-1155)
AINA7: C45.1 R33.1 U1.36 | length 1904.2
  Top Layer w10: v1(-236,-964) -236,-779.83 -220,-763.83 -220,-687.98 -151.78,-619.76 U1.36@-147.86,-619.76
  Bottom Layer w10: C45.1@-840,-1165 -840,-1097 ; v1(-236,-964) -803,-964 -840,-1001 -840,-1097 ; R33.1@-195,-1165 -195,-1114 -236,-1073 -636,-1073 -654,-1055 -798,-1055 -840,-1097
AINA8: C46.2 R37.1 U1.35 | length 2110.5
  Top Layer w10: v1(-361,-1144) -370.21,-1134.79 -370.21,-1017.21 -280,-927 -280,-765 -248,-733 -248,-688.14 -165.7,-605.84 U1.35@-161.78,-605.84
  Bottom Layer w10: C46.2@-1585,-1255 -1292,-1255 ; R37.1@-1252.5,-1165 -1252.5,-1215.5 -1292,-1255 ; v1(-361,-1144) -400,-1105 -430,-1105 -443,-1118 -611,-1118 -770,-1277 -798,-1277 -817,-1296 -886,-1296 -972,-1210 -1060,-1210 -1105,-1255 -1292,-1255
AINB1: J7.1 JP2.9 U1.46 | length 1292.1
  Top Layer w10: JP2.9@-292.56,-1551.26 -292.56,-1436.65 -195.91,-1340 v1(-10,-1340) ; U1.46@102.69,-717.2 104.77,-717.2 104.77,-719.28 167.11,-781.62 167.11,-1242.11 J7.1@210,-1284.99
  Bottom Layer w10: v1@-10.52,-1335.52 40.01,-1284.99 J7.1@210,-1284.99
AINB2: JP2.10 U1.47 | length 1583.7
  Top Layer w10: JP2.10@-292.56,-1630 -260,-1630 -252,-1638 -252,-1652 -186.49,-1717.51 127.49,-1717.51 144,-1701 144,-1404 246,-1302 246,-1128.54 183.11,-1065.66 183.11,-765.85 120.54,-703.28 U1.47@116.61,-703.28
AINB3: JP2.11 U1.48 | length 1826
  Top Layer w10: v1(-243,-1513) -119.92,-1513 -97.31,-1535.61 -97.31,-1569.69 -76,-1591 -28,-1591 -18,-1581 -18,-1533 v1(-63,-1488) ; U1.48@130.53,-689.36 134.46,-689.36 200,-754.9 200,-1033 232,-1065 264,-1065 v1(280,-1081)
  Bottom Layer w10: JP2.11@-371.3,-1551.26 -371.3,-1532 -337,-1532 -318,-1513 v1(-243,-1513) ; v1(-63,-1488) -63,-1442 -37,-1416 303,-1416 346,-1373 346,-1147 v1(280,-1081)
AINB4: JP2.12 U1.49 | length 1650.3
  Top Layer w10: U1.49@144.45,-675.44 224.14,-755.12 224.14,-832.14 346,-954 346,-1054 262,-1138 262,-1427 v1(169,-1520)
  Bottom Layer w10: JP2.12@-371.3,-1630 -371.3,-1651.77 -337.7,-1651.77 -321.48,-1668 -36.9,-1668 -16,-1647.1 -16,-1614.98 6.98,-1592 97,-1592 v1(169,-1520)
AINB5: JP2.13 U1.50 | length 1804.4
  Top Layer w10: U1.50@158.37,-661.52 243.23,-746.37 243.23,-820.23 371.5,-948.5 v1(371.5,-1032)
  Bottom Layer w10: JP2.13@-450.04,-1551.26 -415,-1551.26 -415,-1571 -396,-1590 -108,-1590 -97,-1579 -97,-1539 -88,-1530 -88,-1396 -66,-1374 216,-1374 246,-1344 246,-1065 279,-1032 v1(371.5,-1032)
AINB6: JP2.14 U1.51 | length 1908.9
  Top Layer w10: U1.51@172.29,-647.6 172.29,-651.52 327,-806.23 327,-881.37 396.87,-951.24 396.87,-1043.94 351,-1089.81 351,-1527 288,-1590 v1(209,-1590)
  Bottom Layer w10: JP2.14@-450.04,-1630 -450.04,-1657 -423.04,-1684 -369.48,-1684 -353.48,-1700 99,-1700 v1(209,-1590)
AINB7: JP2.15 U1.52 | length 2268.6
  Top Layer w10: v1(184,-1564) 184,-1641 219,-1676 346.37,-1676 396.3,-1626.07 396.3,-1081 412.87,-1064.43 412.87,-944.61 343,-874.74 343,-786.54 186.21,-636 U1.52@186.21,-633.68
  Bottom Layer w10: JP2.15@-528.78,-1551.26 -488.04,-1592 -424,-1592 -412,-1604 -412,-1652 -396,-1668 -347,-1668 -331,-1684 -12,-1684 4,-1668 86,-1668 184,-1570 v1(184,-1564)
AINB8: JP2.16 U1.53 | length 4497
  Top Layer w10: v1(-1015,-1505) -1015,-800 -1162,-653 -1162,-522 -998,-358 v1(-998,-138) ; v1(-153,-210) -121,-210 -105,-194 -105,-146.77 -42.46,-84.24 -42.46,-57.46 -21,-36 4,-36 54.14,-86.14 54.14,-629.14 60,-635 94,-635 141,-588 168.37,-588 U1.53@200.13,-619.76
  Bottom Layer w10: v1(-1015,-1505) -1041,-1531 -1041,-1580 -1052,-1591 -1180,-1591 -1197,-1608 -1197,-1651 -1164,-1684 -547.23,-1684 -542,-1678.77 -542,-1630 JP2.16@-528.78,-1630 ; v1(-998,-138) -977.85,-117.85 -876.85,-117.85 -861,-102 -814,-102 -793.27,-122.73 -385.44,-122.73 -322,-186.16 -176.84,-186.16 v1(-153,-210)
BANK0: R24.2 U5.9 U5.10 | length 1928.6
  Top Layer w10: U5.10@-1103.36,768.9 U5.9@-1077.77,768.9 -1077.77,664.77 v1(-973,560) ; v1(-296,107) -182,107 -169,94 v1(-54,94)
  Bottom Layer w10: v1(-973,560) -973,246 -934.5,207.5 -558,207.5 -547.5,218 -407,218 v1(-296,107) ; v1(-54,94) -37,111 -5.75,111 33.25,150 116,150 171.3,94.7 R24.2@171.3,20.06
BANK1: R25.2 U5.12 U5.13 | length 1698.8
  Top Layer w10: U5.13@-1180.13,768.9 U5.12@-1154.54,768.9 -1154.54,693.54 -964,503 v1(-914,503) ; v1(-64,232) 36,332 v1(85,332)
  Bottom Layer w10: v1(-914,503) -859,448 -812,448 -775,411 -247,411 -166,330 -62,330 -44,312 -44,252 v1(-64,232) ; v1(85,332) 96.73,343.73 R25.2@130.73,343.73
BANK2: R23.2 U5.2 U5.5 | length 1615.9
  Top Layer w10: U5.2@-1180.13,463.79 -1180.13,508.87 -1170,519 -1117.36,519 -1103.36,505 U5.5@-1103.36,463.79 -1103.36,425 -1089.36,411 -1032,411 v1(-936,315) ; v1(-828,299) -808,319 v1(-808,479)
  Bottom Layer w10: v1(-936,315) -844,315 v1(-828,299) ; v1(-808,479) -759,430 -183,430 -134.82,381.82 -91.18,381.82 -43,430 R23.2@20,430
BBAT: JP1.56 U10.3 | length 9199.3
  Top Layer w10: v1(-3145,1040) -3145,-1495.69 v1(-2685.69,-1955) ; v1(-2680,1040) -2673.44,1033.44 -2583.44,1033.44 v1(-2580,1030) ; U10.3@870,-905 870,-934.86 857,-1953.36 857,-1961.64 860.36,-1965 875,-1979.64 v1(875,-2285)
  Bottom Layer w10: v1(-3145,1040) v1(-2680,1040) ; v1(-2685.69,-1955) -2350.69,-2290 v1@880,-2290 ; v1(-2580,1030) -2580,1133.62 JP1.56@-2403.74,1309.88
CANRXB: JP1.52 JP2.60 U1.28 | length 6910.4
  Top Layer w10: v1(-2650,755) -2647.5,752.5 -2647.5,-1267.5 v1(-2645,-1270) ; JP2.60@-2261.06,-1630 -2262,-1630 -2262,-1658 -2252,-1668 -1916,-1668 -1908,-1660 -1908,-1609 -1926,-1591 -1959.78,-1591 -1984,-1566.78 -1984,-872 v1(-1861,-749) ; v1(-327,-669) -327,-576.19 U1.28@-259.21,-508.41
  Bottom Layer w10: v1(-2650,755) -2561.12,843.88 -2531.12,843.88 -2449.89,925.11 -2449.89,1106.25 JP1.52@-2403.74,1152.4 ; v1(-2645,-1270) -2630,-1285 -2316.42,-1285 -2065.81,-1535.61 -2065.81,-1566.91 -2087.94,-1589.03 -2119.23,-1589.03 -2144.55,-1563.71 -2144.55,-1535.61 -2207.08,-1473.08 -2255.2,-1473.08 -2261.06,-1478.94 -2261.06,-1507.63 -2255.2,-1513.49 -2245.42,-1513.49 -2223.29,-1535.61 -2223.29,-1566.91 -2245.42,-1589.03 -2251.24,-1589.03 -2257.1,-1594.89 -2257.1,-1626.04 JP2.60@-2261.06,-1630 ; v1(-1861,-749) -1690,-749 -1648.02,-707.02 -553.18,-707.02 -499.16,-653.01 -414,-653.01 -385.5,-681.5 -339.5,-681.5 v1(-327,-669)
CANTXB: JP1.50 U1.27 | length 4271.9
  Top Layer w10: JP1.50@-2403.74,1073.66 -2403.74,1102 -2390,1102 -2364,1128 v1(-2364,1427) ; v1(-847,1082) -854,1082 -854,455 -861,448 -861,399 -853,391 -853,283 -796,226 -796,-88 v1(-836,-128) ; U1.27@-273.13,-494.49 -269.2,-494.49 -194.62,-419.9 v1(-194.62,-291.75)
  Bottom Layer w10: v1(-2364,1427) -2265,1427 -2165,1327 -2165,1315 -2134,1284 -2060,1284 -1888.46,1112.46 -1522.35,1112.46 -1506.82,1128 -893,1128 v1(-847,1082) ; v1(-836,-128) -836,-135 -828,-143 -397.1,-143 -337.94,-202.16 -284.21,-202.16 v1(-194.62,-291.75)